# Altium PCB UPCNSL-ABS-COMMS-RFPATEST-v1.0.PcbDoc
Units mm, origin at the board's own origin, x right, y up, seen from the top; angles counter-clockwise.
Board outline 100.28 x 98.1 mm, 2 copper layers (Top Layer, Bottom Layer); 49 components, 56 nets, 282 pads, 242 vias.
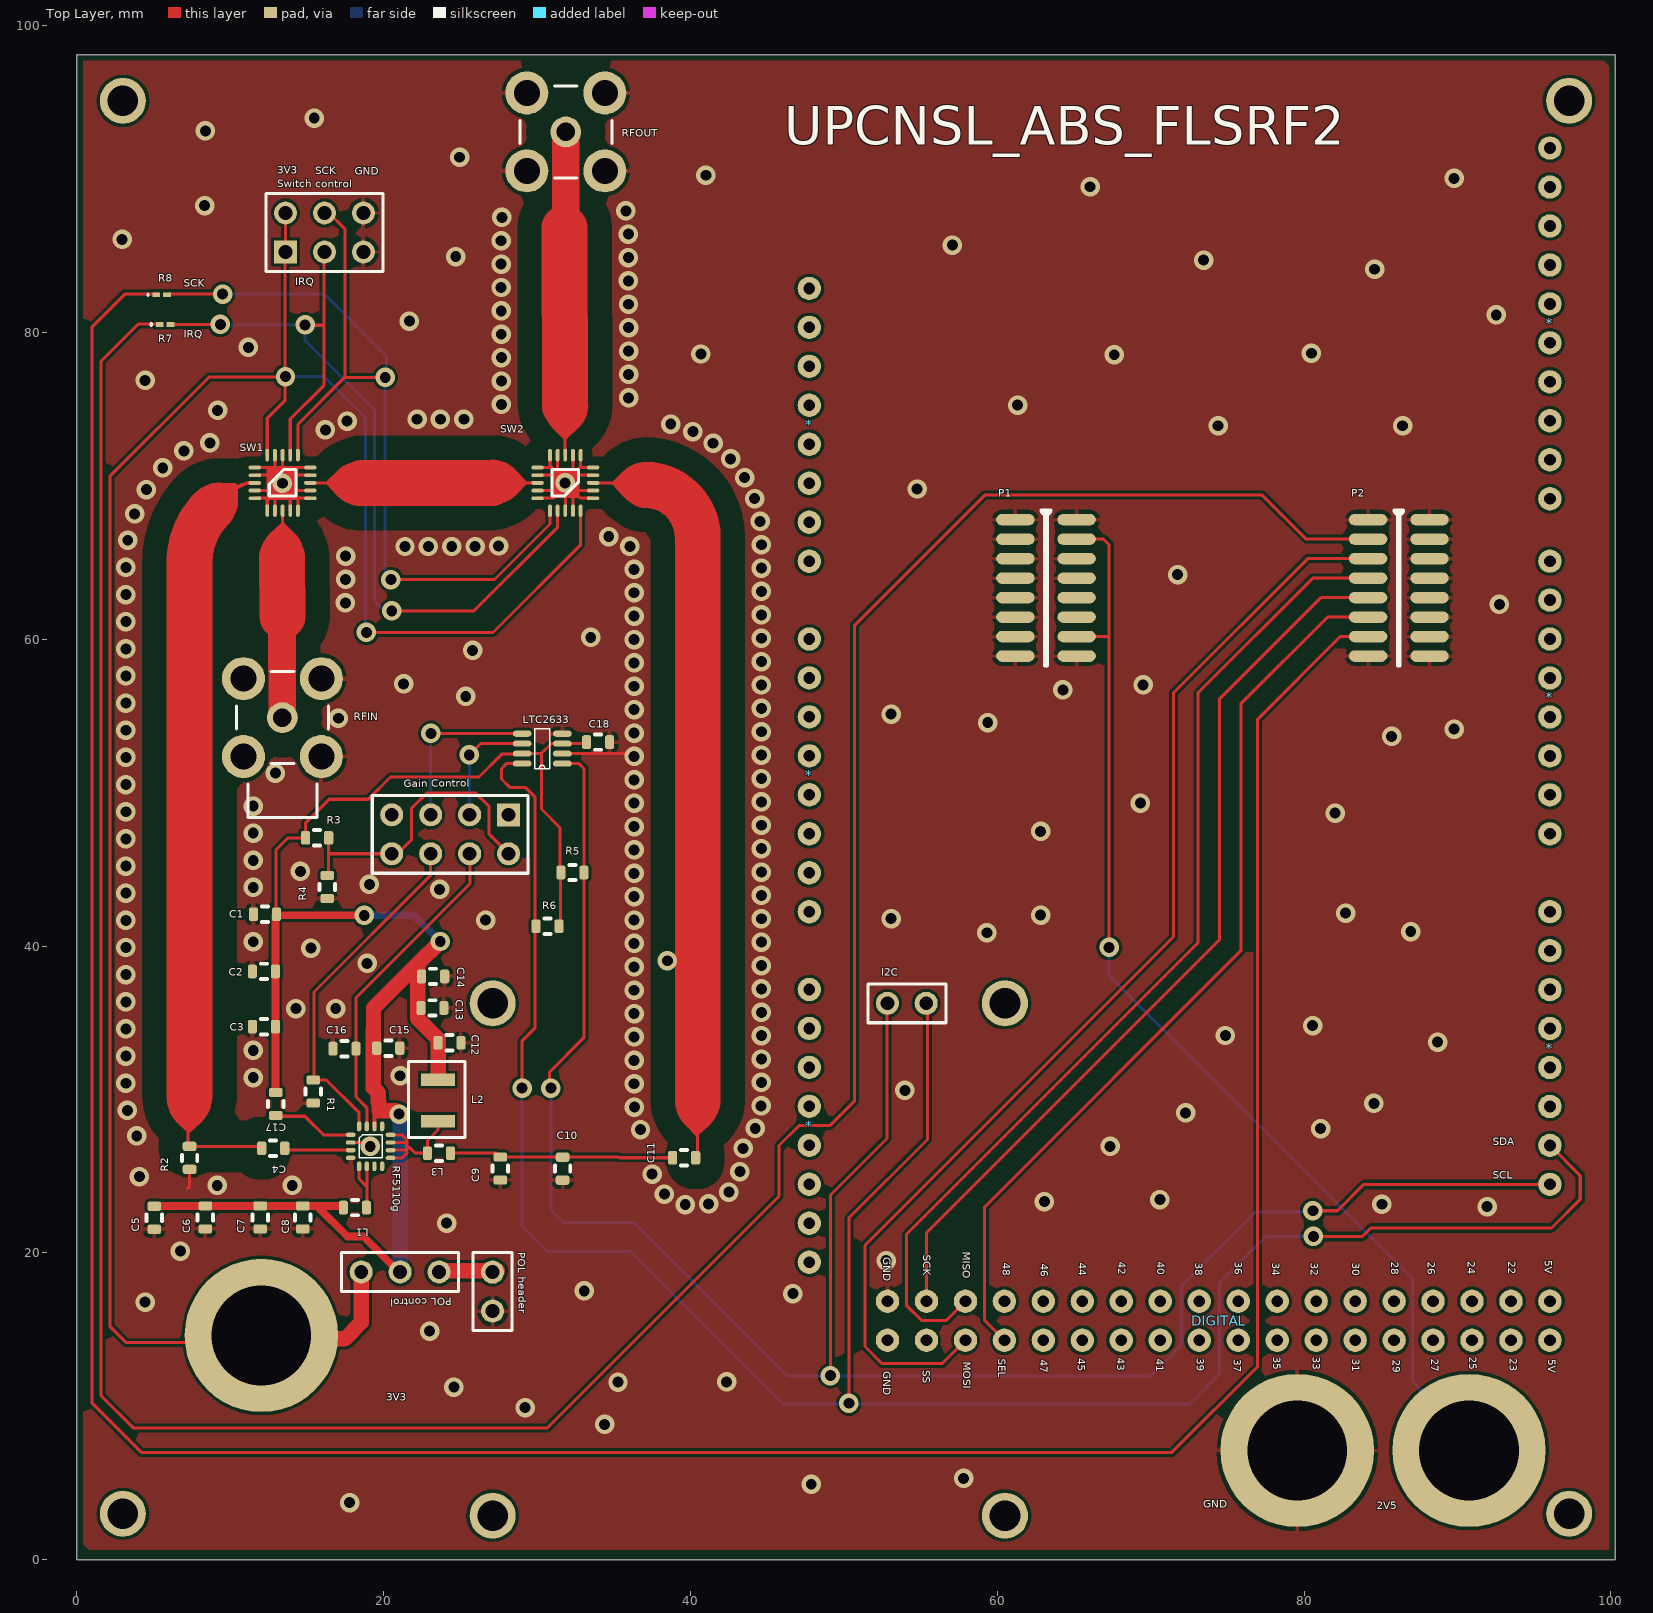
[diagram p0: Top Layer view]
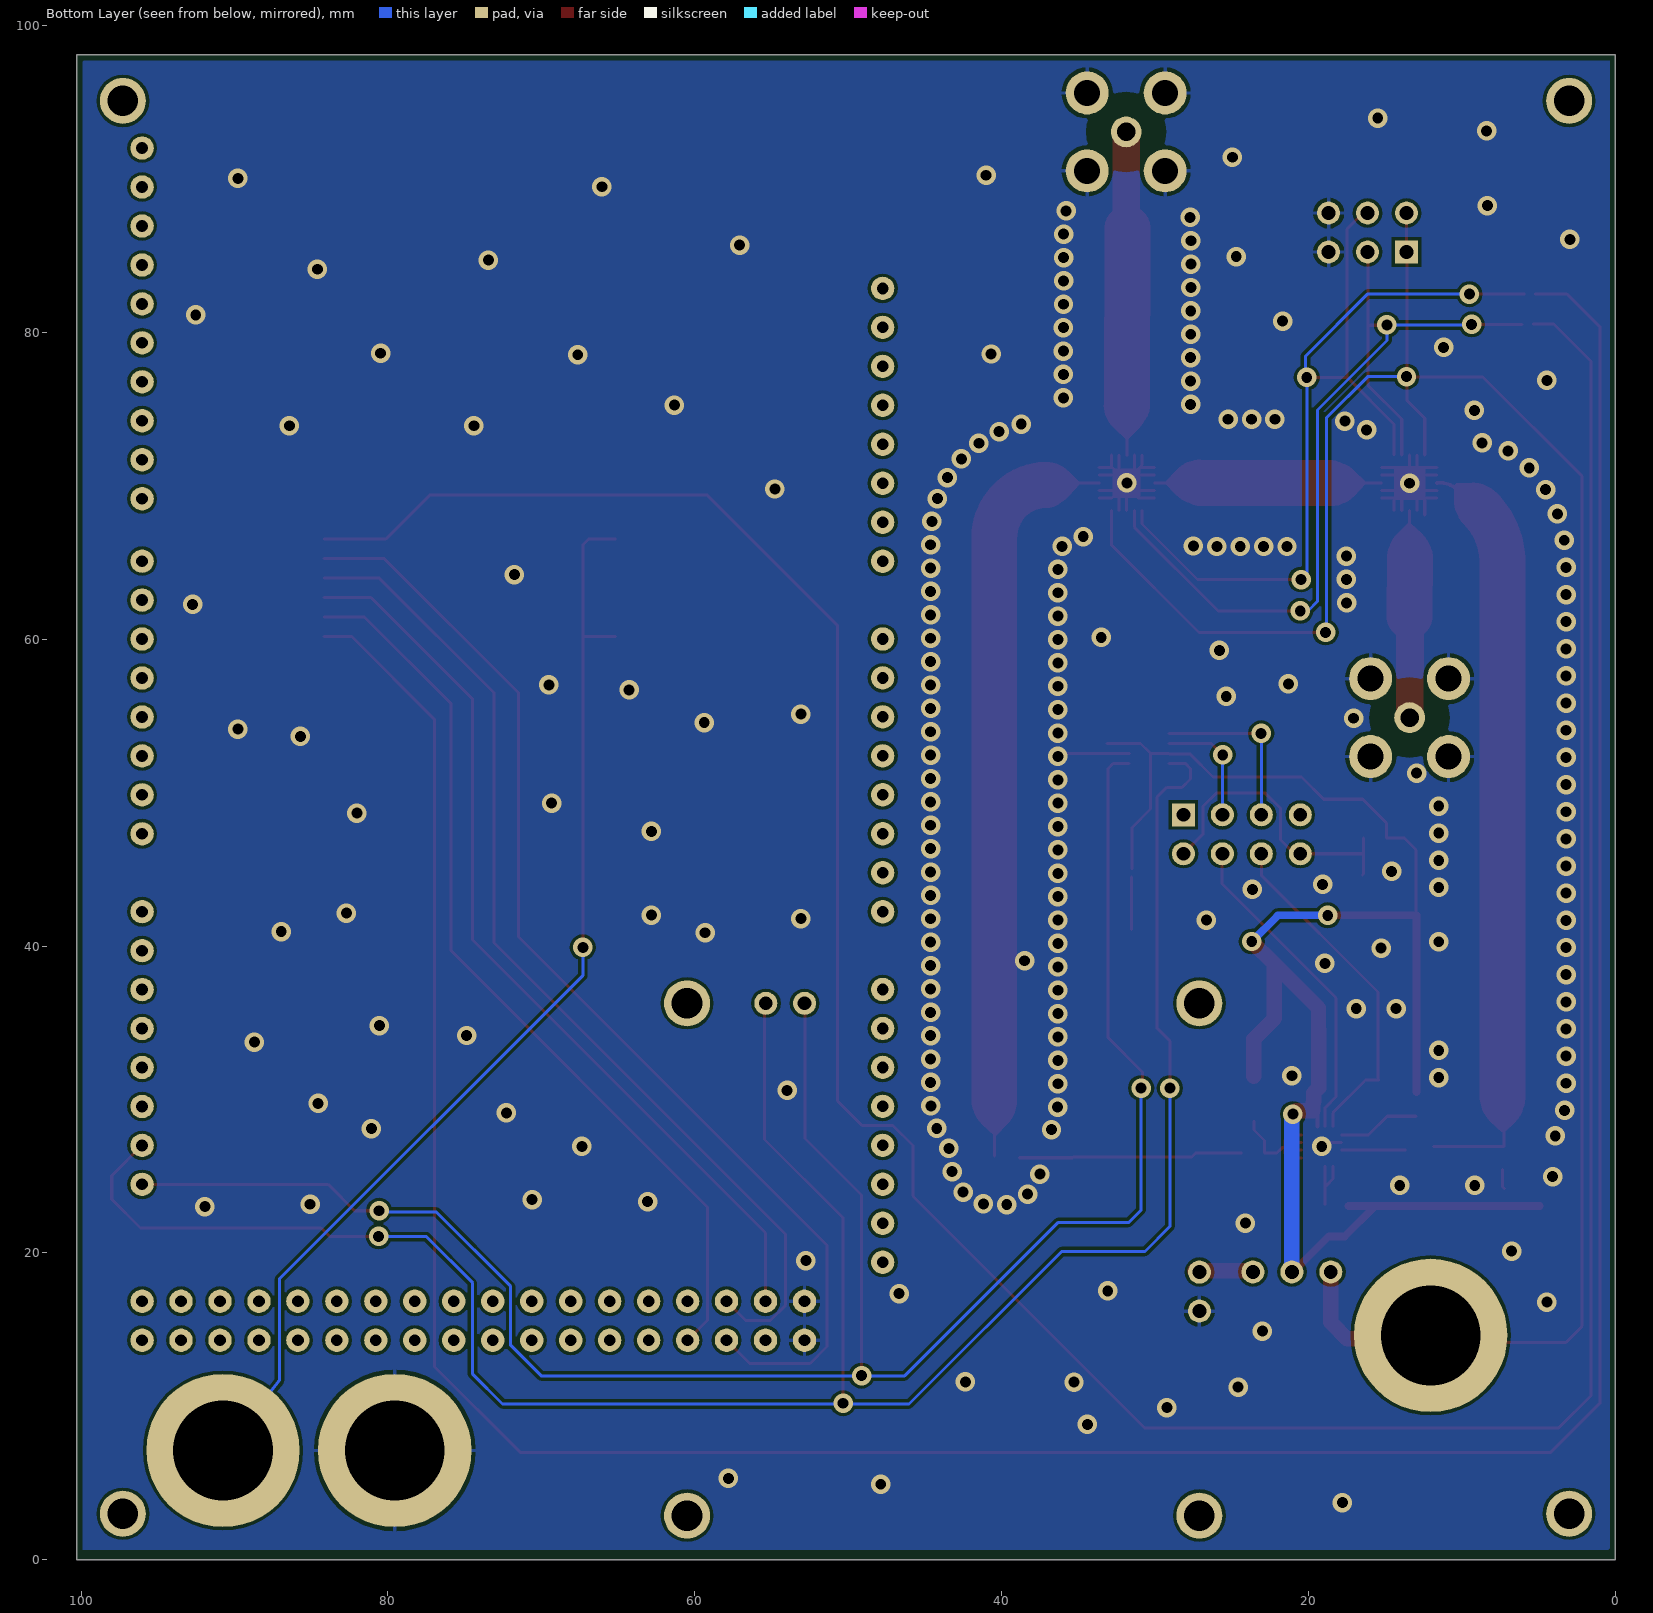
[diagram p1: Bottom Layer view, seen from below]
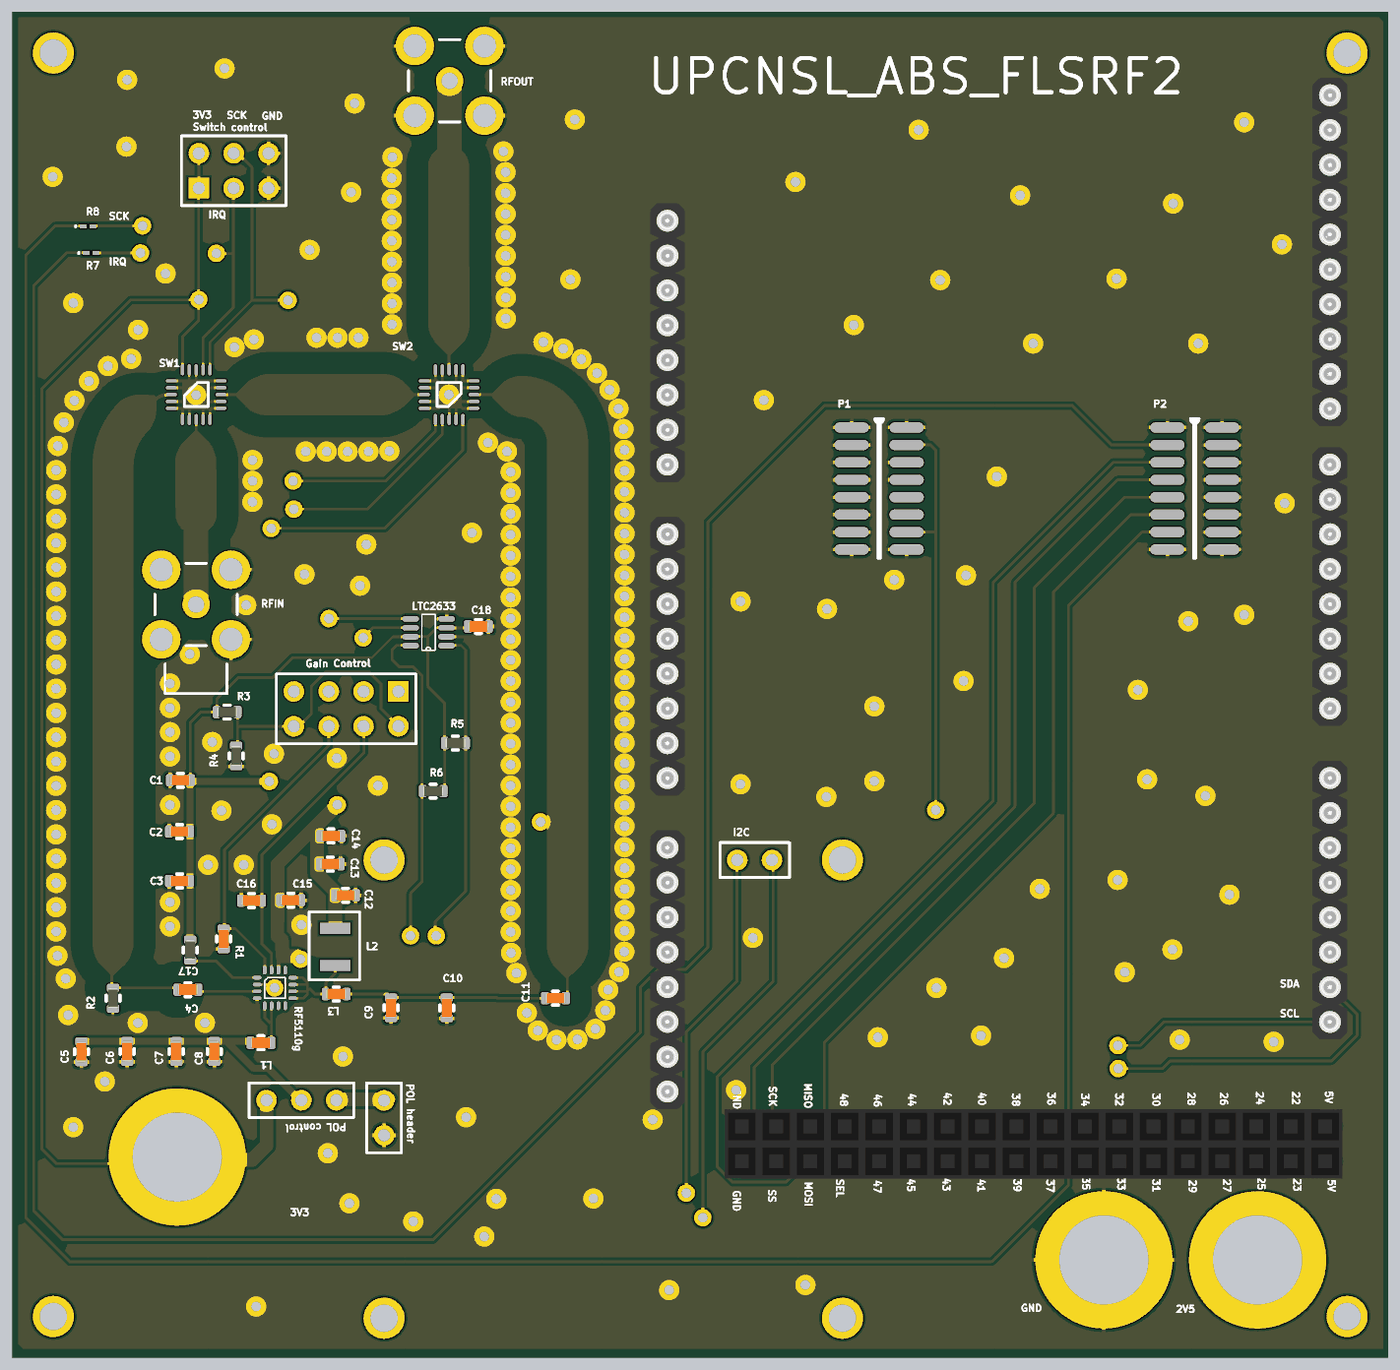
[diagram p2: 3D render of the assembled board from above, using the file's embedded part models]

## Layer stack, top to bottom
Top Solder: solder mask 0.0102, Solder Resist, Dk 3.5
Top Layer: signal copper 0.0356
Dielectric 1: dielectric 0.32, FR-4, Dk 4.8
Bottom Layer: signal copper 0.0356
Bottom Solder: solder mask 0.0102, Solder Resist, Dk 3.5

## Board outline
0,0 100.275,0 100.275,98.1 0,98.1

## Design rules (kind name [scope] priority, off if disabled: settings)
Clearance Clearance_RF [(InNet('RF') OR InNet('RF I/0') OR InNet('RF SW') OR InNet('NetC4_2') OR InNet('NetC11_1')) vs (InNet('GND') AND InPolygon)] p1: gap=1.6
Clearance [All] p2: gap=0.2
ComponentClearance [All] p1: gap=0.2 collisioncheckmode=3 verticalgap=0.2 showdistances=FALSE
HoleSize [All] p1: absolutevalues=TRUE maxlimit=10 minlimit=0.5 maxpercent=80.000 minpercent=20.000
HoleToHoleClearance [All] p1: gap=0.2 allowstackedmicrovias=TRUE
MinimumSolderMaskSliver [All] p1 off: minsoldermaskwidth=0.1
PlaneClearance [All] p1: clearance=0.6
PolygonConnect viagnd [IsVia vs InNet('GND')] p1: connectstyle=Direct reliefconductorwidth=0.254 reliefentries=4 polygonreliefangle="90 Angle" airgapwidth=0.254
PolygonConnect [All] p2: connectstyle=Relief reliefconductorwidth=0.254 reliefentries=4 polygonreliefangle="90 Angle" airgapwidth=0.254
RoomDefinition UPCNSL-ABS-FLS-RFS2 [InComponentClass('UPCNSL-ABS-FLS-RFS2')] p1: confinementstyle=ConfineOut formatcopy=TRUE lockcomponents=FALSE outline -40.425,-75.1 10.375,-75.1 10.375,-49.7 -40.425,-49.7
RoutingVias [All] p1: holewidth=0.6 width=1 viastyle="Through Hole" minholewidth=0.5 minwidth=1.27 maxholewidth=10 maxwidth=1.27
SilkToSilkClearance [All] p1: silktosilkclearance=0.2
SilkToSolderMaskClearance [IsPad] p1: minsilkscreentomaskgap=0.075 clearancetoexposedcopper=TRUE
SolderMaskExpansion [All] p1: expansion=0.102
Width [All] p1: maxlimit=3 minlimit=0.2 preferedwidth=0.2
23 further rules are at their usual default settings.

## Classes and differential pairs
component class UPCNSL-ABS-FLS-RFS2: * C1 C2 C3 C4 C5 C6 C7 C8 C9 C10 C11 C12 C13 C14 C15 C16 C17 C18 DIGITAL "Gain Control" I2C L1 L2 L3 ltc2633 P1 P2 "POL control" "POL header" R1 R2 R3 R4 R5 R6 R7 R8 RF5110g RFIN RFOUT SW1 SW2 "Switch control"

## Components (designator, comment, footprint, x,y, rotation, side; value= is the part's Value field where it differs from the comment)
* "COMUNICATION" ADCH 96.025,42.25 r270 top locked
* "PWM" ADCH 96.025,65.1 r270 top locked
* "POWER" ADCH 47.75,82.875 r270 top locked
* "ADCL" ADCH 47.75,60.025 r270 top locked
* "HEADER 1X10" "HEADER 1X10" 96.025,92.025 r270 top locked
* "ADCH" ADCH 47.75,37.175 r270 top locked
C1 "CAP0603" CAP0603 12.259,42.081 r0 top
C2 "CAP0603" CAP0603 12.194,38.351 r0 top
C3 "CAP0603" CAP0603 12.194,34.751 r0 top
C4 "CAP0603" CAP0603 12.8,26.825 r180 top
C5 "CAP0603" CAP0603 5.046,22.295 r90 top
C6 "CAP0603" CAP0603 8.373,22.32 r90 top
C7 "CAP0603" CAP0603 11.955,22.32 r90 top
C8 "CAP0603" CAP0603 14.723,22.32 r90 top
C9 "CAP0603" CAP0603 27.605,25.505 r90 top
C10 "CAP0603" CAP0603 31.665,25.495 r90 top
C11 "CAP0603" CAP0603 39.587,26.204 r180 top
C12 "CAP0603" CAP0603 24.289,33.704 r180 top
C13 "CAP0603" CAP0603 23.225,38.025 r180 top
C14 "" CAP0603 23.175,35.975 r0 top
C15 "CAP0603" CAP0603 20.3,33.35 r0 top
C16 "CAP0603" CAP0603 17.441,33.318 r180 top
C17 "CAP0603" CAP0603 15.409,30.524 r270 top
C18 "CAP0603" CAP0603 33.975,53.3 r0 top
DIGITAL "IO_36" "HEADER 2X18" 96.025,16.85 r270 top locked
"Gain Control" "Header 4X2" HDR2X4 28.144,48.562 r180 top (schematic designator "Control guany")
I2C "Header 2" HDR1X2#1 55.375,36.275 r180 top
L1 "LT2" CAP0603 18.127,22.955 r180 top
L2 "LT2" CAP0603 23.605,26.505 r0 top
L3 "LT2" "NR3012 - duplicate" 23.537,29.94 r90 top
LTC2633 "LTC2633" "LTC2633 - duplicate1" 31.65,51.9 r180 top (schematic designator *)
P1 "Header 8X2" "AX5043 - duplicate" 61.175,67.8 r0 top
P2 "Header 8X2" "AX5043 - duplicate" 84.175,67.8 r0 top
"POL control" "Header 3" HDR1X3 18.533,18.764 r0 top
"POL header" "Header 2" HDR1X2#2 27.1,18.75 r270 top
R1 "RES0603" RES0603 12.971,29.712 r270 top
R2 "RES0603" RES0603 7.35,26.2 r90 top
R3 "RES0603" RES0603 15.663,47.06 r0 top
R4 "RES0603" RES0603 16.323,43.859 r90 top
R5 "RES0603" RES0603 32.3,44.8 r180 top (schematic designator R2)
R6 "RES0603" RES0603 30.675,41.3 r0 top (schematic designator R2)
R7 "RES0603" 0603 5.75,80.525 r0 top
R8 "RES0603" 0603 5.525,82.475 r0 top
RF5110g "RF5110g" "RF5110g - duplicate3" 17.85,27.7 r0 top
RFIN "ANTENNA" MCX5.08-H5 13.4,54.9 r90 top
RFOUT "ANTENNA" MCX5.08-H5 31.875,93.075 r270 top
SW1 "SWITCH" Switch#1 11.6,71.2 r0 top
SW2 "SWITCH" Switch#2 33.65,69.2 r180 top
"Switch control" "Header 3X2" HDR2X3 13.6,85.25 r0 top

## Footprints (in the part's own frame and the unit in brackets; to place one, negate y for a bottom-side part, rotate by r counter-clockwise, add the part's x,y. Pads: shape width x height; smd on the part's side, far side on the other; paste and mask are expansions set on the pad)
0603 [mm] "Chip Inductor, Body 0.6x0.3mm, IPC High Density"
  rect 0.5x0.3 smd: 1(-0.35,0) 2(0.35,0)
  silkscreen extent -0.9,-0.05 -0.9,0.05, body extent -0.33,-0.18 0.33,0.18, height 0.55
ADCH [mil]
  round 60 hole 30: 1(0,0) 2(100,0) 3(200,0) 4(300,0) 5(400,0) 6(500,0) 7(600,0) 8(700,0)
  body extent -50,-50 750,50, height 276
"AX5043 - duplicate" [mm]
  oval 2.5x0.75 smd: 1(0,0) 2(0,-1.27) 3(0,-2.54) 4(0,-3.81) 5(0,-5.08) 6(0,-6.35) 7(0,-7.62) 8(0,-8.89) 9(4,-8.89) 10(4,-7.62) 11(4,-6.35) 12(4,-5.08) 13(4,-3.81) 14(4,-2.54) 15(4,-1.27) 16(4,0)
  silkscreen extent 1.68,-9.53 2.32,0.64
CAP0603 [mm] "Capacitor Chip Inductor, Body 0.6x0.3mm, IPC High Density"
  rrect50% 0.6x0.9 smd: 1(-0.75,0) 2(0.75,0)
  silkscreen extent -0.2,-0.5 0.2,0.5, body extent -0.76,-0.38 0.76,0.38, height 0.76
HDR1X2#1 [mm] "Connector; Header; 2 Position"
  round 1.5 hole 0.9: 1(0.01,0) 2(2.54,0)
  silkscreen extent -1.27,-1.27 3.81,1.27
HDR1X2#2 [mm] "Connector; Header; 2 Position"
  round 1.5 hole 0.9: 1(0,0) 2(2.54,0)
  silkscreen extent -1.27,-1.27 3.81,1.27
HDR1X3 [mm] "Connector; Header; 3 Position"
  round 1.5 hole 0.9: 1(0,0) 2(2.54,0) 3(5.08,0)
  silkscreen extent -1.27,-1.27 6.35,1.27
HDR2X3 [mm] "Connector; Header; 3x2 Position"
  rect 1.5x1.5 hole 0.9: 1(0,0)
  round 1.5 hole 0.9: 2(0,2.54) 3(2.54,0) 4(2.54,2.54) 5(5.08,0) 6(5.08,2.54)
  silkscreen extent -1.27,-1.27 6.35,3.81
HDR2X4 [mm] "Connector; Header; 4x2 Position"
  rect 1.5x1.5 hole 0.9: 1(0,0)
  round 1.5 hole 0.9: 2(0,2.54) 3(2.54,0) 4(2.54,2.54) 5(5.08,0) 6(5.08,2.54) 7(7.62,0) 8(7.62,2.54)
  silkscreen extent -1.27,-1.27 8.89,3.81
"HEADER 1X10" [mil]
  round 60 hole 30: 1(0,0) 2(100,0) 3(200,0) 4(300,0) 5(400,0) 6(500,0) 7(600,0) 8(700,0) 9(800,0) 10(900,0)
  body extent -50,-50 950,50, height 276
"HEADER 2X18" [mil]
  round 60 hole 30: 1(0,0) 2(100,0) 3(0,-100) 4(100,-100) 5(0,-200) 6(100,-200) 7(0,-300) 8(100,-300) 9(0,-400) 10(100,-400) 11(0,-500) 12(100,-500) 13(0,-600) 14(100,-600) 15(0,-700) 16(100,-700) 17(0,-800) 18(100,-800) 19(0,-900) 20(100,-900) 21(0,-1000) 22(100,-1000) 23(0,-1100) 24(100,-1100) 25(0,-1200) 26(100,-1200) 27(0,-1300) 28(100,-1300) 29(0,-1400) 30(100,-1400) 31(0,-1500) 32(100,-1500) 33(0,-1600) 34(100,-1600) 35(0,-1700) 36(100,-1700)
  body extent -50,-1737 150,36, height 327
"LTC2633 - duplicate1" [mm]
  oval 1.22x0.4 smd: 1(0,0) 2(0,-0.65) 3(0,-1.3) 4(0,-1.95) 5(2.62,-1.95) 6(2.62,-1.3) 7(2.62,-0.65) 8(2.62,0)
  silkscreen extent 0.82,-2.28 1.8,0.32
MCX5.08-H5 [mm] "Connector; RF Coaxial, MCX, Thru-Hole; 5 Position; Right-Angle"
  round 2 hole 1.2: 1(0,0)
  round 2.8 hole 1.7: 2(-2.54,-2.54) 3(2.54,-2.54) 4(2.54,2.54) 5(-2.54,2.54)
  silkscreen extent -6.5,-3 3,3
"NR3012 - duplicate" [mm]
  rect 0.8x2.2 smd: 1(-1.35,0) 2(1.35,0)
  silkscreen extent -2.41,-1.78 2.54,1.9
RES0603 [mm] "Resistor Chip Inductor, Body 0.6x0.3mm, IPC High Density"
  rrect50% 0.6x0.9 smd: 1(-0.75,0) 2(0.75,0)
  silkscreen extent -0.2,-0.5 0.2,0.5, body extent -0.76,-0.38 0.76,0.38, height 0.76
"RF5110g - duplicate3" [mm]
  oval 0.64x0.28 smd mask+0.05: 1(0,0) 2(0,-0.5) 3(0,-1) 4(0,-1.5) 9(2.6,-1.5) 10(2.6,-1) 11(2.6,-0.5) 12(2.6,0)
  oval 0.28x0.64 smd mask+0.05: 5(0.55,-2.05) 6(1.05,-2.05) 7(1.55,-2.05) 8(2.05,-2.05) 13(2.05,0.55) 14(1.55,0.55) 15(1.05,0.55) 16(0.55,0.55)
  silkscreen extent 0.55,-1.5 2.05,0
Switch#1 [mm]
  oval 0.81x0.25 smd mask+0.075: 1(0,0)
  oval 0.81x0.25 smd: 2(0,-0.5) 3(0,-1) 4(0,-1.5) 5(0,-2) 11(3.62,-2) 12(3.62,-1.5) 13(3.62,-1) 14(3.62,-0.5) 15(3.62,0)
  oval 0.25x0.81 smd mask+0.075: 6(0.81,-2.81)
  oval 0.25x0.81 smd paste+0 mask+0.075: 7(1.31,-2.81)
  oval 0.25x0.81 smd: 8(1.81,-2.81) 9(2.31,-2.81) 10(2.81,-2.81) 16(2.81,0.81) 17(2.31,0.81) 18(1.81,0.81) 19(1.31,0.81) 20(0.81,0.81)
  silkscreen extent 0.94,-1.87 2.68,-0.13
Switch#2 [mm]
  oval 0.81x0.25 smd: 1(0,0) 2(0,-0.5) 3(0,-1) 4(0,-1.5) 5(0,-2) 11(3.62,-2) 12(3.62,-1.5) 13(3.62,-1) 14(3.62,-0.5) 15(3.62,0)
  oval 0.25x0.81 smd: 6(0.81,-2.81) 7(1.31,-2.81) 8(1.81,-2.81) 9(2.31,-2.81) 10(2.81,-2.81) 16(2.81,0.81) 17(2.31,0.81) 18(1.81,0.81) 19(1.31,0.81) 20(0.81,0.81)
  silkscreen extent 0.94,-1.87 2.68,-0.13

## Part data
* * * * *: library part "HEADER 1X8"
C1 C2 C3 C4 C5 C6 C7 C8 C9 C10 C11 C12 C13 C15 C16 C17 C18: "Capacitor"
C14: library part "Cap Pol1", "Polarized Capacitor (Radial)"
"Gain Control": "Header, 4-Pin, Dual row"
I2C "POL header": "Header, 2-Pin"
L1 L2 L3: library part Inductor, "Inductor"
P1 P2: "Header, 8-Pin, Dual row"
"POL control": "Header, 3-Pin"
R1 R2 R3 R4 R5 R6 R7 R8: "Resistor"
RF5110g: "RF Power Amplifier"
RFIN RFOUT: library part COAX-F, "RF Coaxial PCB Connector, MCX; Thru-Hole, Right-Angle Mount Socket, Blunt Post Terminal, 50 Ohm Impedance"
"Switch control": "Header, 3-Pin, Dual row"

## Free pads (board coordinates)
  round 3 hole 2: 0(3,3) 0(3,95.1) 0(27.1,2.875) 0(27.1,36.275) 0(60.5,2.875) 0(60.5,36.275) 0(97.275,95.1) 0(97.275,3)
  round 10 hole 6.5: ""(12.025,14.625) ""(90.75,7.125)
  round 10 hole 6.5 unplated: ""(79.552,7.125)

## Via types
v1: diameter 1.27, hole 0.711, Top Layer to Bottom Layer, 242 vias

## Nets (pads, with @x,y where several pads share a name; then routed paths per layer and width w, separated by ;. In a path a pad name is that pad's centre, name@x,y a point inside that pad or via, vN(x,y) a via of type N, cw(c..) or ccw(c..) an arc to the next point about the centre after c; other vN are vias at no path point)
2V5: P1.10 P1.15 pad.@90.75,7.125 | length 73
  Top Layer w0.2: P1.10 67.295,60.18 ; P1.15 66.92,66.53 67.295,66.155 v1(67.295,39.92)
  Bottom Layer w0.2: v1(67.295,39.92) 67.295,38.08 87.075,18.3 87.075,11.675 pad.@90.75,6.975
3V3: "POL control.1" "Switch control.1" "Switch control.2" pad.@12.025,14.625 SW1.20 SW2.20 | length 140.5
  Top Layer w0.2: pad.@11.965,14.565 11.55,14.15 3.225,14.15 2.15,15.225 2.15,70.625 8.625,77.1 v1@13.58,77.1 ; SW1.20 12.41,74.414 13.58,75.584 v1@13.58,77.1 ; 13.58,85.25 v1@13.58,77.1 ; 13.6,85.25 13.6,87.79 ; v1(18.875,60.45) 27.125,60.45 32.84,66.165 SW2.20
  Top Layer w1: pad.@16.45,14.403 17.471,14.4 18.533,15.462 18.533,18.269
  Bottom Layer w0.2: v1@13.5,77.125 16.125,77.125 18.825,74.425 18.825,60.5 v1(18.875,60.45)
  other v1: 13.6,77.125
CLK: DIGITAL.33 P2.5 | length 59.6
  Top Layer w0.2: DIGITAL.33 55.385,21.31 74.475,40.4 74.475,56.1 81.095,62.72 P2.5
GND: "POL header.2" "Switch control.5" "Switch control.6" C1.1 C2.1 C3.1 C5.1 C6.1 C7.1 C8.1 C9.1 C10.1 C12.1 C13.1 C14.2 C15.2 C16.2 C17.2 C18.2 DIGITAL.35 DIGITAL.36 LTC2633.2 LTC2633.4 P1.1 P1.2 P1.3 P1.4 P1.5 P1.6 P1.7 P1.8 P1.9 P1.13 P1.14 P1.16 P2.1 P2.8 P2.9 P2.10 P2.11 P2.12 P2.13 P2.14 P2.15 P2.16 pad.@79.552,7.125 R2.1 R4.1 RF5110g.2 RF5110g.4 RFIN.2 RFIN.3 RFIN.4 RFIN.5 RFOUT.2 RFOUT.3 RFOUT.4 RFOUT.5 SW1.1 SW1.2 SW1.4 SW1.5 SW1.6 SW1.7 SW1.9 SW1.10 SW1.11 SW1.12 SW1.14 SW1.15 SW1.18 SW1.19 SW2.1 SW2.2 SW2.4 SW2.5 SW2.6 SW2.7 SW2.9 SW2.10 SW2.11 SW2.12 SW2.14 SW2.15 SW2.18 SW2.19 | length 47
  Top Layer w0.2: 7.225,24.2 7.35,24.325 R2.1 ; SW1.5 12.425,69.2 12.625,69.4 12.625,69.7 ; SW1.4@11.6,69.685 SW1.4 12.625,69.7 ; SW1.2 12.6,70.7 ; SW1.1 12.375,71.2 12.625,70.95 12.625,69.7 ; SW1.6@12.41,68.11 SW1.6 12.41,69.175 14.4,69.175 14.41,69.165 SW1.10 ; SW1.7 12.91,69.16 ; SW1.19 12.91,70.665 v1(13.4,70.175) v1@13.41,70.185 ; SW1.18 v1@13.41,70.185 ; 13.725,69.2 SW1.11 ; 13.875,69.7 SW1.12 ; SW1.9 13.91,69.165 ; SW1.14 13.925,70.7 ; SW1.15 14.425,71.2 13.925,70.7 ; RF5110g.2 v1@18.875,27.2 ; SW2.15 31.075,69.2 31.35,69.475 ; SW2.14 31.325,69.7 ; SW2.12 31.325,70.7 ; SW2.11 31,71.2 ; SW2.10 30.84,71.36 31,71.2 ; 31.25,70.95 31,71.2 ; 31.34,70.715 SW2.9 ; LTC2633.2 36.143,52.55 v1(36.325,52.368) ; v1(31.825,70.2) v1@31.84,70.185 ; SW2.18 v1@31.84,70.185 ; SW2.19 32.34,69.66 ; 32.34,70.61 SW2.7 ; 32.38,69.7 SW2.2 ; 32.575,71 32.775,71.2 ; 32.625,70.7 SW2.4 ; SW2.6 32.84,71.265 32.775,71.2 ; SW2.1 32.825,69.2 v1@31.84,70.185 ; SW2.5 32.775,71.2 ; v1@13.41,70.185 13.925,70.7
  other v1: 17.775,3.725 47.875,4.925 57.8,5.3 34.4,8.825 29.225,9.925 24.575,11.25 35.275,11.575 42.35,11.6 23,14.9 4.45,16.8 46.675,17.35 33.075,17.525 52.75,19.5 6.75,20.125 24.1,21.95 91.925,23.025 39.661,23.157 85.075,23.175 41.184,23.198 63.075,23.35 70.6,23.475 38.297,23.838 42.502,23.963 9.15,24.4 14.04,24.409 4.075,24.975 37.499,25.136 43.223,25.306 43.426,26.817 19.125,26.95 67.35,26.95 3.902,27.631 36.741,28.035 81.075,28.1 44.221,28.117 72.275,29.125 3.298,29.295 36.349,29.508 44.606,29.592 84.55,29.75 53.975,30.6 36.325,31.032 3.201,31.062 44.622,31.116 11.499,31.435 21.075,31.55 36.325,32.556 44.622,32.64 3.201,32.832 11.499,33.205 88.7,33.75 36.325,34.08 44.622,34.164 74.875,34.175 3.201,34.602 80.55,34.825 36.325,35.604 44.622,35.688 14.275,35.925 16.875,35.925 3.201,36.372 36.325,37.128 44.622,37.212 3.201,38.142 36.325,38.652 44.622,38.736 18.925,38.875 38.5,39.05 15.25,39.875 3.201,39.912 36.325,40.176 44.622,40.26 11.499,40.285 59.325,40.875 86.95,40.95 3.201,41.682 26.65,41.7 36.325,41.7 44.622,41.784 53.075,41.8 62.825,42.025 82.7,42.15 36.325,43.224 44.622,43.308 3.201,43.452 23.65,43.7 11.499,43.825 19.075,44.025 36.325,44.748 44.622,44.832 14.575,44.875 3.201,45.222 11.499,45.595 36.325,46.272 44.622,46.356 3.201,46.992 11.499,47.365 62.825,47.475 36.325,47.796 44.622,47.88 82.025,48.675 3.201,48.762 11.499,49.135 36.325,49.32 69.325,49.325 44.622,49.404 3.201,50.532 36.325,50.844 44.622,50.928 12.941,51.286 3.201,52.302 44.622,52.452 85.7,53.675 36.325,53.892 44.622,53.976 3.201,54.072 89.775,54.15 59.375,54.575 17.05,54.854 53.075,55.125 36.325,55.416 44.622,55.5 3.201,55.842 25.35,56.275 64.275,56.7 36.325,56.94 44.622,57.024 69.5,57.025 21.3,57.1 3.201,57.612 36.325,58.464 44.622,58.548 25.8,59.275 3.201,59.382 36.325,59.988 44.622,60.072 33.5,60.125 3.201,61.152 36.325,61.512 44.622,61.596 92.725,62.275 17.504,62.381 3.201,62.922 36.325,63.036 44.622,63.12 17.514,63.905 71.75,64.225 36.325,64.56 44.622,64.644 3.201,64.692 17.515,65.429 21.39,66.052 22.914,66.052 24.438,66.052 25.962,66.052 36.056,66.06 27.486,66.084 44.622,66.168 3.32,66.458 34.671,66.698 44.544,67.69 3.761,68.172 44.177,69.169 4.53,69.766 54.775,69.8 43.53,70.549 5.596,71.179 42.613,71.766 6.982,72.28 41.476,72.781 8.671,72.808 40.158,73.545 16.198,73.657 74.4,73.925 86.425,73.925 38.713,74.03 17.612,74.224 22.179,74.348 23.703,74.348 25.227,74.348 9.175,74.925 61.325,75.275 27.676,75.315 35.973,75.745 27.673,76.839 4.45,76.875 35.969,77.269 27.67,78.363 67.625,78.55 40.675,78.6 80.475,78.65 35.966,78.793 11.175,79.025 27.666,79.887 35.963,80.317 21.675,80.75 92.525,81.15 27.663,81.411 35.959,81.841 27.66,82.935 35.956,83.365 84.6,84.125 27.656,84.459 73.45,84.725 35.953,84.889 24.7,84.95 57.075,85.7 27.653,85.983 2.95,86.075 35.95,86.413 27.711,87.506 35.793,87.929 8.325,88.275 66.05,89.5 89.775,90.05 41,90.25 24.95,91.425 8.375,93.15 15.475,93.975
IO22: DIGITAL.3
IO23: DIGITAL.4
IO24: DIGITAL.5
IO25: DIGITAL.6
IO26: DIGITAL.7
IO27: DIGITAL.8
IO28: DIGITAL.9
IO29: DIGITAL.10
IO30: DIGITAL.11
IO31: DIGITAL.12
IO32: DIGITAL.13
IO33: DIGITAL.14
IO34: DIGITAL.15
IO35: DIGITAL.16
IO36: DIGITAL.17
IO37: DIGITAL.18
IO38: DIGITAL.19
IO39: DIGITAL.20
IO40: DIGITAL.21
IO41: DIGITAL.22
IO42: DIGITAL.23
IO43: DIGITAL.24
IO44: DIGITAL.25
IO45: DIGITAL.26
IO46: DIGITAL.27
IO47: DIGITAL.28
IO48: DIGITAL.29
IO53: DIGITAL.34
IRQ: "Switch control.3" P2.2 R7.1 R7.2 SW1.17 SW2.17 | length 261.2
  Top Layer w0.2: R7.1@5.35,80.55 4,80.55 1.575,78.125 1.575,10.7 3.675,8.6 30.675,8.6 45.775,23.7 45.775,27 47.075,28.3 49.075,28.3 50.7,29.925 50.7,60.925 59.175,69.4 77.275,69.4 80.145,66.53 P2.2 ; R7.2@6.075,80.525 v1(9.35,80.525) ; SW1.17 13.91,74.36 16.12,76.57 16.12,80.475 ; v1(14.875,80.5) 14.9,80.475 16.12,80.475 ; 16.12,85.25 16.12,80.475 ; v1(20.525,61.85) 25.875,61.85 31.34,67.315 SW2.17
  Bottom Layer w0.2: v1@9.925,80.5 v1(14.875,80.5) 14.875,79.475 19.4,74.95 19.4,62.475 20.025,61.85 v1(20.525,61.85)
MISO: DIGITAL.31 P2.4 | length 66.8
  Top Layer w0.2: DIGITAL.31 56.675,15.6 55.075,15.6 54.075,16.6 54.075,21.2 73.075,40.2 73.075,56.5 80.565,63.99 P2.4
MOSI: DIGITAL.32 P2.3 | length 74.9
  Top Layer w0.2: DIGITAL.32 56.415,12.8 52.475,12.8 51.375,13.9 51.375,20.5 71.475,40.6 71.475,56.5 80.235,65.26 P2.3
NetC4_1: C4.1 RF5110g.3 | length 4.2
  Top Layer w0.2: C4.1@13.675,26.7 RF5110g.3
NetC4_2: C4.2 R2.2 SW1.3 | length 46.5
  Top Layer w0.2: 7.25,28.402 7.25,26.95 C4.2@11.85,26.95
  Top Layer w0.254: 10.126,69.568 cw(c11.44,68.538) SW1.3
  Top Layer w2.997: 7.35,30.2 7.35,65.2 cw(c12.354,65.011) 8.836,68.575
NetC9_2: C9.2 C10.2 C11.2 L2.2 | length 14.5
  Top Layer w0.2: L2.2 27.355,26.505 C9.2 27.615,26.245 C10.2 35.321,26.245 ; 35.362,26.204 C11.2
NetC11_1: C11.1 SW2.3 | length 45.3
  Top Layer w0.2: SW2.3@33.625,70.2 35.175,70.2 ; C11.1@40.45,26.325 40.45,28.075
  Top Layer w2.997: 37.075,70.075 cw(c37.024,66.626) 40.474,66.575 ; 40.474,29.884 40.474,66.5
NetC16_1: "Gain Control.4" C16.1 RF5110g.15 | length 21.2
  Top Layer w0.2: RF5110g.15 18.9,29.472 18.191,30.181 C16.1 18.191,36.634 25.632,44.075 25.632,45.994 25.604,46.022
NetC17_1: "Gain Control.6" C17.1 RF5110g.16 | length 22.5
  Top Layer w0.2: C17.1 C17.1@15.46,31.274 ; 16.259,31.274 C17.1@15.46,31.274 ; 16.336,31.198 18.4,29.134 RF5110g.16 ; 23.064,46.022 23.064,44.614 15.46,37.01 C17.1@15.46,31.274
"NetControl guany_2": "Gain Control.2" "Gain Control.8" R3.2 R4.2 | length 19.7
  Top Layer w0.2: R3.2 16.413,44.699 R4.2@16.465,44.647 ; 16.466,46.022 20.524,46.022 20.905,46.022 21.8,46.917 21.8,48.975 22.8,49.975 26,49.975 26.875,49.1 26.875,47.291 28.144,46.022
"NetControl guany_3": "Gain Control.3" LTC2633.6 | length 7.3
  Top Layer w0.2: v1(25.579,52.473) 26.32,53.215 LTC2633.6@29.08,53.215
  Bottom Layer w0.2: 25.604,48.562 v1@25.604,52.042
"NetControl guany_5": "Gain Control.5" LTC2633.5 | length 11.4
  Top Layer w0.2: v1@23.075,53.865 LTC2633.5@29.08,53.865
  Bottom Layer w0.2: 23.064,48.562 v1@23.064,53.921
  other v1: 23.075,53.875
NetL1_1: L1.1 RF5110g.5 RF5110g.6 | length 3.9
  Top Layer w0.2: RF5110g.5 18.4,24.816 18.801,24.415 ; L1.1@18.9,23.16 RF5110g.6
NetL2_1: L2.1 L3.1 RF5110g.9 RF5110g.10 RF5110g.11 RF5110g.12 | length 9.2
  Top Layer w0.2: RF5110g.9 21.219,26.2 21.505,26.486 21.505,26.867 ; RF5110g.10 21.44,26.7 ; RF5110g.11 21.5,27.2 ; RF5110g.12 21.18,27.7 21.505,27.375 21.505,26.867 ; L3.1 23.537,28.01 22.855,27.328 L2.1 22.07,26.505 21.708,26.867 21.505,26.867
"NetPOL control_3": "POL control.3" "POL header.1" | length 3.9
  Top Layer w1: 23.538,18.833 27.4,18.833
NetR1_2: R1.2 RF5110g.1 | length 5.4
  Top Layer w0.2: R1.2@12.971,28.911 14.864,28.911 16.074,27.7 RF5110g.1
RF: RFIN.1 SW1.8 | length 11
  Top Layer w0.2: 13.41,67.235 SW1.8
  Top Layer w1.8: 13.375,60.925 RFIN.1
  Top Layer w2.997: 13.374,65.356 13.4,61.5
"RF I/0": RFOUT.1 SW2.8 | length 18.8
  Top Layer w0.2: SW2.8@31.825,71.976 31.825,73.225
  Top Layer w1.8: 31.875,87.124 RFOUT.1
  Top Layer w2.997: 31.8,86.825 31.825,75.225
"RF SW": SW1.13 SW2.13 | length 10.4
  Top Layer w0.2: SW1.13 16.3,70.2 ; 29.1,70.2 SW2.13
  Top Layer w2.996: 18.6,70.2 27.025,70.2
SCK: "Switch control.4" P2.7 R8.1 R8.2 SW1.16 SW2.16 | length 269.6
  Top Layer w0.2: R8.1@5.225,82.5 3.125,82.5 1,80.375 1,10.2 4.2,7 71.375,7 76.975,12.6 76.975,54.8 82.355,60.18 P2.7 ; R8.2@5.925,82.5 v1(9.5,82.5) ; SW1.16 14.41,74.015 17.47,77.075 ; 16.14,87.79 16.44,87.79 17.47,86.76 17.47,77.075 ; v1(20.1,77.075) 17.47,77.075 ; v1(20.475,63.9) 27.225,63.9 30.84,67.515 SW2.16
  Bottom Layer w0.2: v1@9.875,82.5 16.15,82.5 20.175,78.475 20.175,77.325 v1@20.538,76.963 ; v1@20.1,63.925 v1@20.1,76.625
SCL: *.8@96.025,24.47 I2C.2 LTC2633.1 R5.1 | length 133.9
  Top Layer w0.2: v1@30.813,30.838 30.813,31.788 33.05,34.025 33.05,51.575 32.71,51.915 LTC2633.1@31.7,51.915 ; v1(49.125,12) 49.125,23.775 52.815,27.465 I2C.2@52.815,36.275 ; v1(80.575,22.75) 82.175,22.75 83.897,24.472 *.8@96.025,24.472
  Bottom Layer w0.2: v1(30.9,30.75) 30.9,22.8 31.725,21.975 36.325,21.975 46.313,11.988 70.013,11.988 72,13.975 72,17.825 76.85,22.675 v1@80.575,22.675
SDA: *.7@96.025,27.01 I2C.1 LTC2633.8 R6.1 | length 148.2
  Top Layer w0.2: v1(29.025,30.75) 29.025,33.825 29.875,34.675 29.875,49.7 29.225,50.35 28.225,50.35 27.675,50.9 27.675,51.565 28.025,51.915 LTC2633.8@29.08,51.915 ; v1(50.325,10.2) 50.325,22.275 55.45,27.4 I2C.1@55.45,36.275 ; v1(80.6,21.075) 83.8,21.075 84.35,21.625 96.125,21.625 98,23.5 98,25.037 *.7@96.025,27.012
  Bottom Layer w0.2: v1(29.025,30.75) 29.025,21.725 30.65,20.1 36.075,20.1 46.025,10.15 72.525,10.15 74.475,12.1 74.475,18.05 77.5,21.075 v1@80.275,21.075
SEL: DIGITAL.30 P2.6 | length 59.6
  Top Layer w0.2: DIGITAL.30 59.175,15.6 59.175,23 75.875,39.7 75.875,55.8 81.525,61.45 P2.6
VCC: "POL control.2" C1.2 C2.2 C3.2 C5.2 C6.2 C7.2 C8.2 C12.2 C13.2 C14.1 C15.1 C18.1 L1.2 L3.2 LTC2633.3 LTC2633.7 R1.1 R3.1 R5.2 R6.2 RF5110g.14 | length 115.2
  Top Layer w0.2: C6.2@8.166,22.867 C6.2@8.211,22.912 ; C1.2@13.123,41.968 12.975,42.116 12.975,46.277 13.758,47.06 R3.1 14.913,48.037 16.45,49.574 18.999,49.574 20.45,51.025 26.213,51.025 27.727,52.539 LTC2633.7@29.084,52.539 ; LTC2633.7@29.08,52.565 30.29,52.565 ; R5.2@31.5,45.041 31.5,47.725 30.29,48.935 30.29,52.565 ; R6.2@31.525,41.075 R5.2@31.525,44.5 ; LTC2633.3 C18.1@33.125,53.2 ; LTC2633.3@31.7,53.215 30.94,53.215 30.29,52.565
  Top Layer w0.28: RF5110g.14 19.4,29
  Top Layer w0.5: C5.2@4.919,23.061 L1.2@17.377,23.061 ; R1.1@12.944,30.487 C3.2 C1.2@12.944,41.951 ; C1.2@12.944,42.005 v1(18.736,42.005) ; 15.688,23.006 17.619,21.076 18.664,21.076 20.976,18.764
  Top Layer w1: v1(21,29.05) 20.78,29.27 19.7,29.27 19.7,29.803 19.65,29.853 19.65,30.425 19.325,30.75 19.325,30.95 19.329,33.35 19.333,35.972 22.191,38.83 ; L3.2@23.549,31.525 23.549,33.951 22.216,35.284 22.216,38.83 v1(23.689,40.303)
  Bottom Layer w0.5: v1(18.736,42.005) 21.988,42.005 ; 22.064,41.929 v1(23.689,40.303) v1@23.816,40.303
  Bottom Layer w1: 21.073,18.764 v1@21.075,29.05
pads on no net: "Gain Control.1" "Gain Control.7" *.1 *.2 *.3 *.4 *.5 *.6 *.7@47.75,21.935 *.7@47.75,44.785 *.7@47.75,67.635 *.7@96.025,49.86 *.7@96.025,76.785 *.8@47.75,19.395 *.8@47.75,42.245 *.8@47.75,65.095 *.8@96.025,47.32 *.8@96.025,74.245 *.9 *.10 DIGITAL.1 DIGITAL.2 P1.11 P1.12 RF5110g.7 RF5110g.8 RF5110g.13

## Polygon pours and split planes (outlines as drawn)
GND on Bottom Layer "Top Layer-No Net" (solid, pour order 5): 0.35,0.65 0.35,97.725 99.9,97.725 99.9,0.65
GND on Top Layer "Top Layer-No Net" (solid, remove dead copper, pour order 2): 0.425,97.725 99.9,97.725 99.9,0.65 0.425,0.65

## Other copper
Top Layer:
  rectangle net GND: 30.95,69.2 32.775,71.15
  rectangle net GND: 12.375,69.2 14.425,71.3
  region net "RF I/0": 31.92,73.075 31.72,73.075 31.056,73.739 cw(c32.593,75.275) 30.42,75.275 33.32,75.275 cw(c31.256,75.275) 32.661,73.763
  region net "RF SW": 16.3,70.1 16.3,70.3 16.964,70.964 cw(c18.5,69.427) 18.5,71.6 18.5,68.7 cw(c18.5,70.764) 16.988,69.36
  region net "RF SW": 29.3,70.295 29.3,70.095 28.636,69.431 cw(c27.1,70.968) 27,68.797 27,71.693 cw(c27.1,69.631) 28.612,71.036
  region net RF: 13.329,67.556 13.529,67.556 14.193,66.893 cw(c12.656,65.356) 14.829,65.356 13.329,65.356 11.929,65.356 cw(c13.993,65.356) 12.589,66.869
  region net NetC4_2: 7.386,27.872 7.186,27.872 6.522,28.536 cw(c8.058,30.072) 5.886,30.072 8.786,30.072 cw(c6.722,30.072) 8.126,28.56
  region net NetC4_2: 10.36,70.163 10.501,70.021 10.501,69.083 cw(c8.329,69.083) 9.865,67.546 7.814,69.597 cw(c9.274,68.138) 9.35,70.2
  region net NetC11_1: 40.519,27.684 40.319,27.684 39.655,28.348 cw(c41.191,29.884) 39.019,29.884 41.919,29.884 cw(c39.855,29.884) 41.259,28.372
  region net NetC11_1: 34.931,70.07 34.931,70.27 35.595,70.934 cw(c37.131,69.398) 37.131,71.57 37.131,68.67 cw(c37.131,70.734) 35.619,69.33

## Silkscreen, mask and mechanical layers (free items; w line width, h text height)
Top Overlay:
  text "UPCNSL_ABS_FLSRF2" at 46.125,92.225 h2.5
  text "3V3" at 13.075,90.35 h0.5
  text "SCK" at 15.55,90.325 h0.5
  text "GND" at 18.1,90.275 h0.5
  text "IRQ" at 14.225,83.075 h0.5
  text "SCK" at 6.975,82.975 h0.5
  text "IRQ" at 6.975,79.65 h0.5
  text "SDA" at 92.3,27.025 h0.5
  text "SCL" at 92.3,24.85 h0.5
  text "3V3" at 20.175,10.35 h0.5
  text "GND" at 73.425,3.375 h0.5
  text "2V5" at 84.725,3.3 h0.5
Mechanical 3:
  lines w2: -1,0 ccw(c0,0) 0,-1 ; -1,0 ccw(c0,0) 0,-1 ; -1,0 -1,98.1 ; -1,98.1 cw(c0,98.1) 0,99.1 ; -1,98.1 cw(c0,98.1) 0,99.1 ; 0,-1 100.275,-1 ; 0,99.1 100.275,99.1 ; 100.275,-1 ccw(c100.275,0) 101.275,0 ; 100.275,-1 ccw(c100.275,0) 101.275,0 ; 100.275,99.1 cw(c100.275,98.1) 101.275,98.1 ; 100.275,99.1 cw(c100.275,98.1) 101.275,98.1 ; 101.275,0 101.275,98.1

## Text inside footprints (layer, text, board x,y; h text height)
DIGITAL: Top Overlay "GND" at 52.55,12.275 h0.5 r270; Top Overlay "GND" at 52.575,19.725 h0.5 r270; Top Overlay "SS" at 55.125,12.35 h0.5 r270; Top Overlay "SCK" at 55.175,19.875 h0.5 r270; Top Overlay "MOSI" at 57.775,12.9 h0.5 r270; Top Overlay "MISO" at 57.75,20.075 h0.5 r270; Top Overlay "SEL" at 60.075,13.1 h0.5 r270; Top Overlay "48" at 60.35,19.35 h0.5 r270; Top Overlay "47" at 62.8,13.025 h0.5 r270; Top Overlay "46" at 62.825,19.3 h0.5 r270; Top Overlay "45" at 65.25,13.125 h0.5 r270; Top Overlay "44" at 65.3,19.35 h0.5 r270; Top Overlay "43" at 67.825,13.175 h0.5 r270; Top Overlay "42" at 67.9,19.425 h0.5 r270; Top Overlay "41" at 70.375,13.1 h0.5 r270; Top Overlay "40" at 70.425,19.425 h0.5 r270; Top Overlay "39" at 73,13.125 h0.5 r270; Top Overlay "38" at 72.9,19.35 h0.5 r270; Top Overlay "37" at 75.4,13.075 h0.5 r270; Top Overlay "36" at 75.475,19.425 h0.5 r270; Top Overlay "35" at 78,13.25 h0.5 r270; Top Overlay "34" at 77.925,19.35 h0.5 r270; Top Overlay "33" at 80.575,13.225 h0.5 r270; Top Overlay "32" at 80.425,19.375 h0.5 r270; Top Overlay "31" at 83.125,13.1 h0.5 r270; Top Overlay "30" at 83.125,19.35 h0.5 r270; Top Overlay "29" at 85.775,13.05 h0.5 r270; Top Overlay "28" at 85.675,19.425 h0.5 r270; Top Overlay "27" at 88.275,13.1 h0.5 r270; Top Overlay "26" at 88.05,19.425 h0.5 r270; Top Overlay "25" at 90.775,13.25 h0.5 r270; Top Overlay "24" at 90.675,19.475 h0.5 r270; Top Overlay "23" at 93.4,13.15 h0.5 r270; Top Overlay "22" at 93.3,19.475 h0.5 r270; Top Overlay "5V" at 95.9,13.075 h0.5 r270; Top Overlay "5V" at 95.7,19.525 h0.5 r270